# Altium PCB driver.PcbDoc
Units mil, origin at the board's own origin, x right, y up, seen from the top; angles counter-clockwise.
Board outline 3238.38 x 2096.64 mil, 2 copper layers (Top Layer, Bottom Layer); 67 components, 47 nets, 191 pads, 17 vias.
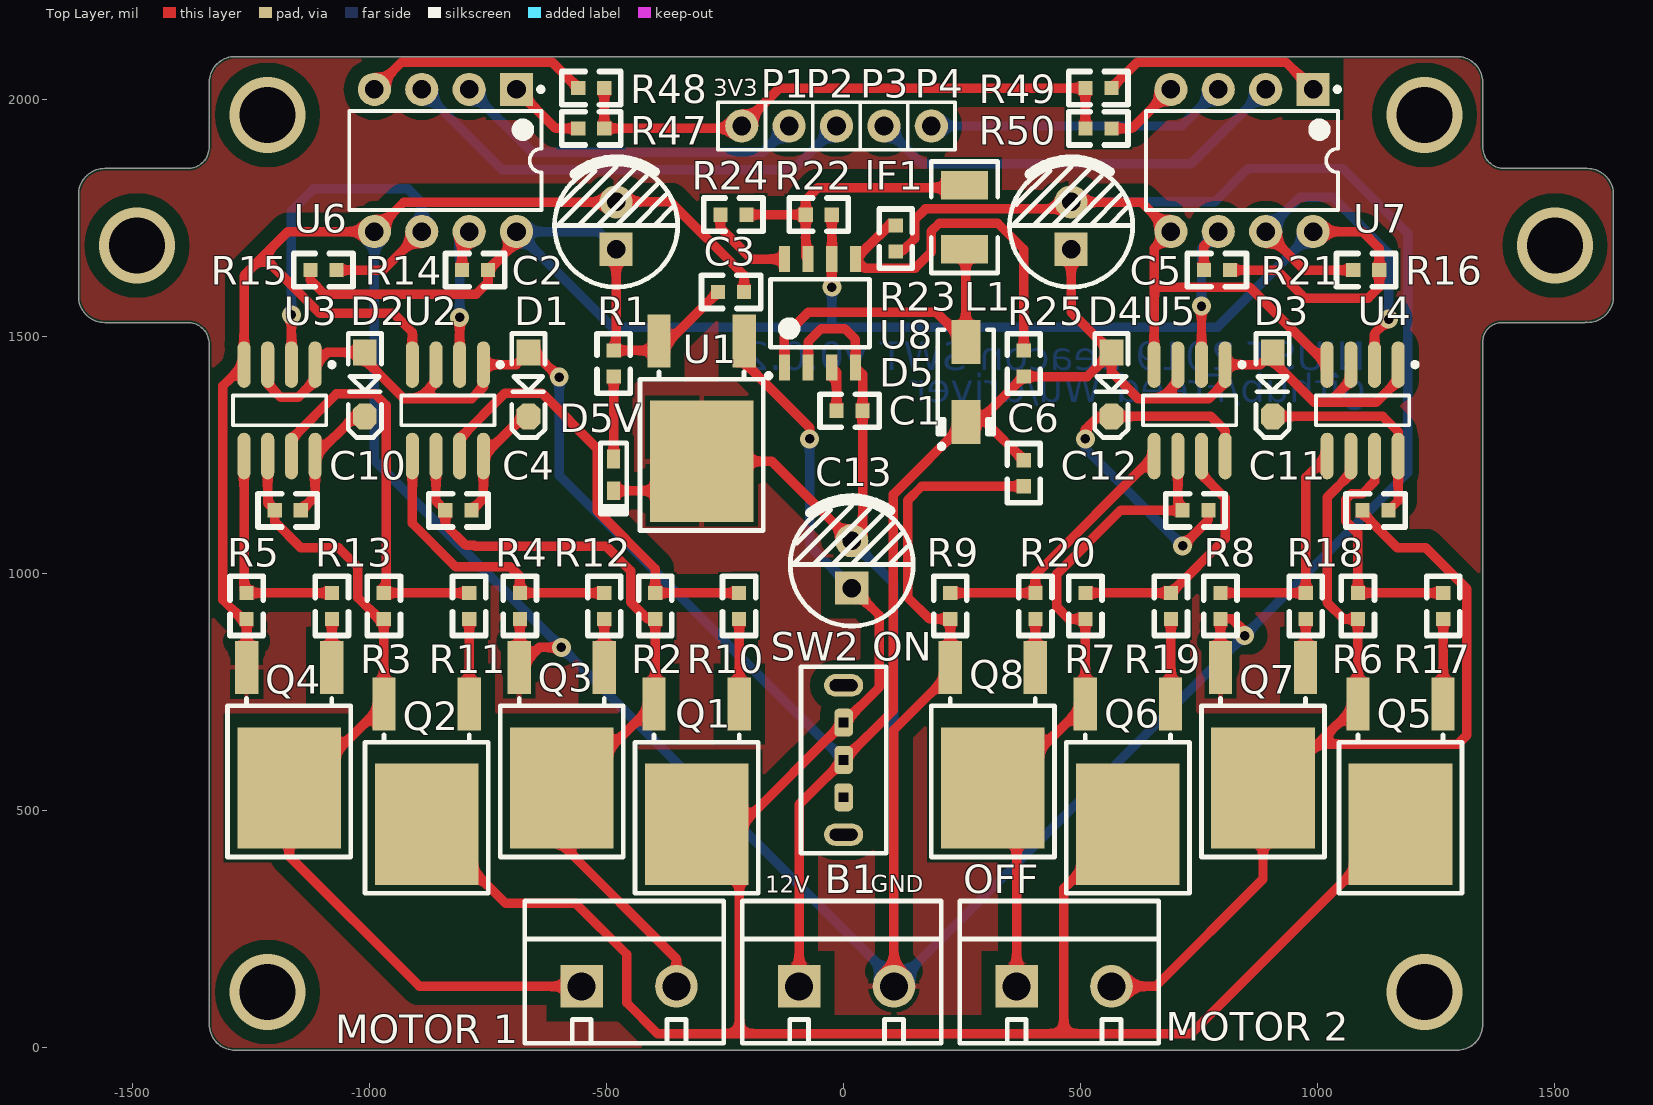
[diagram p0: Top Layer view]
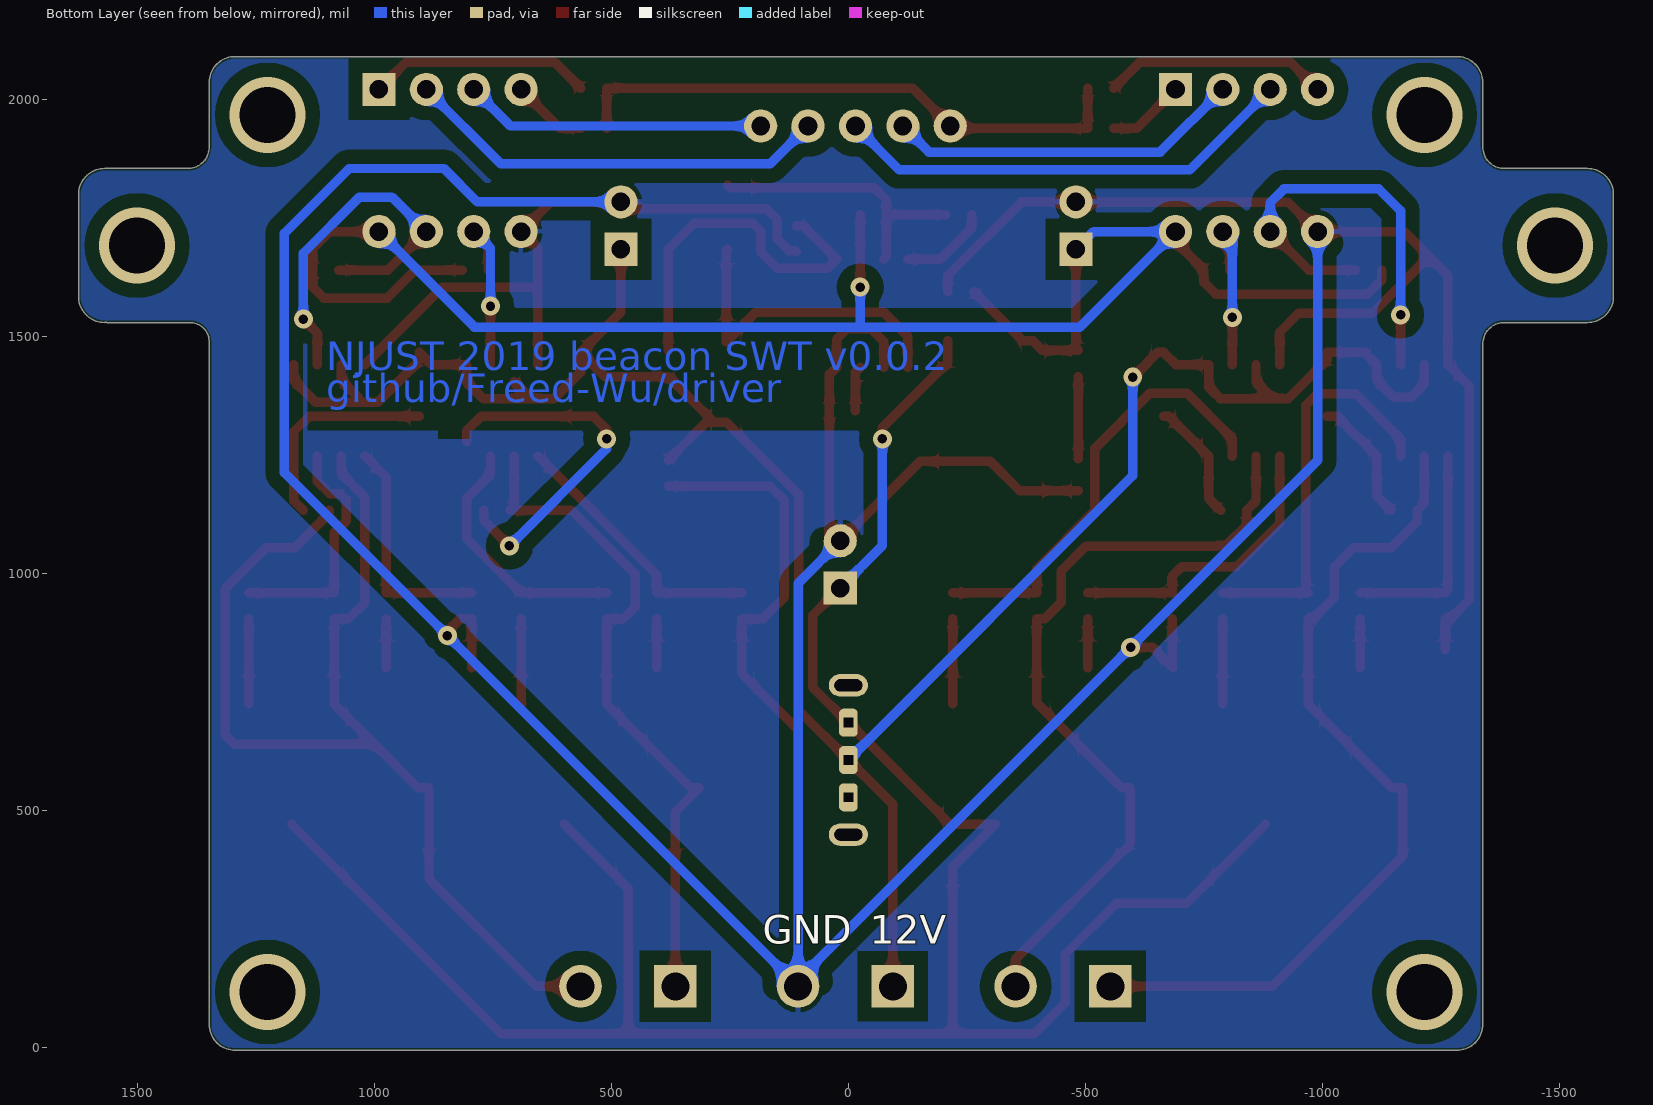
[diagram p1: Bottom Layer view, seen from below]

## Layer stack, top to bottom
Top Solder: solder mask 0.4, Solder Resist, Dk 3.5
Top Layer: signal copper 1.4
Dielectric1: dielectric 12.6, FR-4, Dk 4.8
Bottom Layer: signal copper 1.4
Bottom Solder: solder mask 0.4, Solder Resist, Dk 3.5

## Board outline
-1338.6,49.97 cw(c-1333.58,50) -1338.6,50 -1338.6,1485.43 ccw(c-1383.58,1485.43) -1383.58,1530.42 -1559.17,1530.42 cw(c-1559.17,1585.43) -1614.19,1585.43 -1614.19,1800.39 cw(c-1559.17,1800.39) -1559.17,1855.41 -1383.58,1855.41 ccw(c-1383.58,1900.39) -1338.6,1900.39 -1338.6,2036.61 cw(c-1283.58,2036.61) -1283.65,2091.63 cw(c-1283.58,2086.61) -1283.58,2091.63 1293.58,2091.63 cw(c1293.58,2036.61) 1348.6,2036.61 1348.6,1900.39 ccw(c1393.58,1900.39) 1393.58,1855.41 1569.17,1855.41 cw(c1569.17,1800.39) 1624.19,1800.39 1624.19,1585.43 cw(c1569.17,1585.43) 1569.17,1530.42 cw(c1569.17,1535.43) 1566.67,1531.08 cw(c1564.17,1535.43) 1564.17,1530.42 1389.02,1530.42 ccw(c1389.02,1490) 1348.6,1490 cw(c1343.58,1490) 1348.6,1489.97 1348.6,50.03 cw(c1343.58,50) 1348.6,50 cw(c1343.58,50) 1348.6,49.94 ccw(c1293.58,50) 1348.6,49.95 ccw(c1293.58,50) 1348.6,50 1348.6,50.03 1348.6,49.94 cw(c1293.58,50) 1293.58,-5.01 -1283.58,-5.02 cw(c-1283.58,0) -1283.63,-5.01 cw(c-1283.58,50)

## Design rules (kind name [scope] priority, off if disabled: settings)
Clearance Clearance_1 [InPolygon] p1: gap=30 ignorepadtopadclearanceinfootprint=FALSE
Clearance [All] p2: gap=10 ignorepadtopadclearanceinfootprint=FALSE except(0: Arc-Hole Track-Hole SMDPad-Hole THPad-Hole Via-Hole Fill-Hole Poly-Hole Region-Hole Text-Hole)
FabricationTestpoint [(IsPad And (OnTopLayer Or OnBottomLayer))] p1: side=3 testpointundercomponent=TRUE minsize=40 maxsize=100 preferedsize=60 minholesize=0 maxholesize=40 preferedholesize=32 testpointgrid=1 allowsidetop=TRUE allowsidebottom=TRUE usegrid=TRUE gridtolerance=0.01
PolygonConnect PolygonConnect_1 [IsVia] p1: connectstyle=Direct reliefconductorwidth=10 reliefentries=4 polygonreliefangle="90 Angle" airgapwidth=10
PolygonConnect [All] p2: connectstyle=Relief reliefconductorwidth=10 reliefentries=4 polygonreliefangle="90 Angle" airgapwidth=10
RoutingVias [All] p1: holewidth=20 width=40 viastyle="Through Hole" minholewidth=20 minwidth=40 maxholewidth=28 maxwidth=50
SolderMaskExpansion [All] p1: expansion=2.5
Width PWR [InNetClass('PWR')] p1: maxlimit=60 minlimit=15 preferedwidth=20
Width [All] p2: maxlimit=1000 minlimit=10 preferedwidth=20
29 further rules are at their usual default settings.

## Components (designator, comment, footprint, x,y, rotation, side; value= is the part's Value field where it differs from the comment)
B1 "BAT-IF" KF301-2P -93.88,130 r0 top
C1 "220p" 0603 -15,1344.4 r0 top
C2 "220u/25V" "CAP 2.5*6.3*7 - BK" -480,1735 r90 top
C3 "104" 0603 -265,1595 r0 top
C4 "105" 0603 -785.31,1134.21 r180 top
C5 "220u" "CAP 2.5*6.3*7 - BK" 480,1735 r90 top
C6 "0.1u" 0603 380,1240 r270 top
C10 "105" 0603 -1145.31,1134.21 r180 top
C11 "105" 0603 1149.69,1134.21 r180 top
C12 "105" 0603 769.69,1134.21 r180 top
C13 "220u" "CAP 2.5*6.3*7 - BK" 17.09,1020 r90 top
D1 "IN5819" SOD-123 -665,1400 r270 top
D2 "IN5819" SOD-123 -1010,1400 r270 top
D3 "IN5819" SOD-123 905,1400 r270 top
D4 "IN5819" SOD-123 565,1400 r270 top
D5 "IN5189" SMA 257.74,1405 r270 top
D5V "RED" LED-0603 -485.19,1209.07 r270 top
L1 "120uH" L1210 255,1685 r90 top
lF1 "CON5" 2.54排针1X5 -15,1945 r0 top
"MOTOR 1" "MOTOR IF" KF301-2P -552.76,130 r0 top
"MOTOR 2" "MOTOR IF" KF301-2P 365,130 r0 top
Q1 "7843" TO-252 -310.23,471.92 r180 top
Q2 "7843" TO-252 -879.76,471.92 r180 top
Q3 "7843" TO-252 -594.76,548.42 r180 top
Q4 "7843" TO-252 -1169.76,548.42 r180 top
Q5 "7843" TO-252 1174.77,471.92 r180 top
Q6 "7843" TO-252 599.77,471.92 r180 top
Q7 "7843" TO-252 884.77,548.42 r180 top
Q8 "7843" TO-252 314.77,548.42 r180 top
R1 "1K" 0603 -485.19,1471.5 r270 top
R2 "10K" 0603 -397.45,905 r90 top
R3 "10K" 0603 -970,905 r90 top
R4 "10K" 0603 -683,905 r90 top
R5 "10K" 0603 -1259.53,905 r90 top
R6 "10K" 0603 1085,905 r90 top
R7 "10K" 0603 510,905 r90 top
R8 "10K" 0603 795,905 r90 top
R9 "10K" 0603 225,905 r90 top
R10 "33R" 0603 -220.47,960 r270 top
R11 "33R" 0603 -790,960 r270 top
R12 "33R" 0603 -505,960 r270 top
R13 "33R" 0603 -1079.57,960 r270 top
R14 "390" 0603 -750,1640.98 r180 top
R15 "390" 0603 -1125,1640.98 r0 top
R16 "390" 0603 1075,1640.98 r0 top
R17 "33R" 0603 1265,960 r270 top
R18 "33R" 0603 975,960 r270 top
R19 "33R" 0603 690.43,960 r270 top
R20 "33R" 0603 404.53,960 r270 top
R21 "390" 0603 815,1640.98 r180 top
R22 "0R5" 0603 -25,1757.93 r180 top
R23 "3K8" 0603 110,1680 r90 top
R24 "220" 0603 -260,1757.93 r0 top
R25 "30K" 0603 380,1471.5 r270 top
R47 "390" 0603 -505,1940 r180 top
R48 "390" 0603 -505,2025 r180 top
R49 "390" 0603 510,2025 r0 top
R50 "390" 0603 510,1940 r0 top
SW2 "SW-SPDT" SW3-H2X3_8.6X4.5_L 0,646.89 r90 top
U1 "LM7805" TO-252 -299.76,1237.52 r180 top
U2 "IR2104" SO8_M -835,1345.18 r270 top
U3 "IR2104" SO8_M -1190,1345.18 r270 top
U4 "IR2104" SO8_M 1095,1345.18 r270 top
U5 "IR2104" SO8_M 730,1345.18 r270 top
U6 "HCPL2630" DIP-8 -840,1872.26 r270 top
U7 "HCPL2630" DIP-8 840.43,1872.26 r270 top
U8 "MC34063" SO-8 -50,1550 r90 top

## Footprints (in the part's own frame and the unit in brackets; to place one, negate y for a bottom-side part, rotate by r counter-clockwise, add the part's x,y. Pads: shape width x height; smd on the part's side, far side on the other; paste and mask are expansions set on the pad)
2.54排针1X5 [mil]
  round 70 hole 39.37: 1(-200,0) 2(-100,0) 3(0,0) 4(100,0) 5(200,0)
  silkscreen extent -250,-50 250,50, body extent -250,-50 250,50, height 98
0603 [mil]
  rect 30x30 smd: 1(0,0) 2(55,0)
  silkscreen extent -35,-35 90,35
"CAP 2.5*6.3*7 - BK" [mil]
  rect 70x70 hole 39.37: 1(-50,0)
  round 70 hole 39.37: 2(50,0)
  silkscreen extent -130,-130 140,130, body extent -124,-124 124,124, height 277
DIP-8 [mil]
  rect 70x70 hole 39.37: 1(-150,150)
  round 70 hole 39.37: 2(-150,50) 3(-150,-50) 4(-150,-150) 5(150,-150) 6(150,-50) 7(150,50) 8(150,150)
  silkscreen extent -155,-203 104,206, body extent -142,-203 142,203, height 200
KF301-2P [mil]
  rect 90x90 hole 59.06: 1(0,0)
  round 90 hole 59.06: 2(200,0)
  silkscreen extent -120,-120 300,180, body extent -113,-118 300,181, height 396
L1210 [mil]
  rect 60x100 smd: 1(0,0) 2(135,0)
  silkscreen extent -50,-70 185,70, body extent 7,-52 131,46, height 79
LED-0603 [mm]
  rect 1x0.7 smd: 1(-0.85,0) 2(0.85,0)
  silkscreen extent -1.7,-0.7 2.1,0.7, body extent -1.03,-0.46 1.03,0.45, height 0.85
SMA [mm]
  rect 2.35x1.55 smd: 1(-2.15,0) 2(2.15,0)
  silkscreen extent -2.8,-1.5 3.58,1.5, body extent -2.6,-1.3 2.6,1.3, height 2.64
SO8_M [mm]
  oval 2.5x0.7 smd: 1(-2.45,1.905) 2(-2.45,0.635) 3(-2.45,-0.635) 4(-2.45,-1.905) 5(2.45,-1.905) 6(2.45,-0.635) 7(2.45,0.635) 8(2.45,1.905)
  silkscreen extent -2.57,-2.5 0.8,2.93, body extent -2,-2.5 2,2.5, height 1.75
SO-8 [mm]
  rect 1.4x0.6 smd: 1(-2.9,1.905) 2(-2.9,0.635) 3(-2.9,-0.635) 4(-2.9,-1.905) 5(2.9,-1.905) 6(2.9,-0.635) 7(2.9,0.635) 8(2.9,1.905)
  silkscreen extent -3.48,-2.65 1.82,2.88, body extent -3.03,-2.57 3.03,2.57, height 1.95
SOD-123 [mil]
  rect 55x50 smd: 1(-67.5,0)
  oct 55x50 smd: 2(67.5,0)
  silkscreen extent -108,-35 112,35, body extent -73,-31 73,31, height 48
SW3-H2X3_8.6X4.5_L [mm]
  oval 1.2x2.1 hole 0.65 slot 1.5 at 90 deg: 0(-5,0) 0(3,0)
  rrect50% 1.5x1 hole 0.5 square: 1(-3,0) 2(-1,0) 3(1,0)
  silkscreen extent -6,-2.29 4,2.29, body extent -5.26,-2.23 3.23,2.21, height 8.91
TO-252 [mm]
  rect 1.25x2.85 smd: 1(-2.28,-6.45) 3(2.28,-6.45)
  rect 5.55x6.5 smd: 4(0,0)
  silkscreen extent -3.3,-4.8 3.3,3.7, body extent -3.27,-7.25 3.27,2.69, height 2.41

## Part data
C1 C3 C4 C6 C10 C11 C12: library part 普通电容, "Capacitor"
C2 C5 C13: library part 电解电容, "Capacitor"
D1 D2 D3 D4: library part DIODE
D5: library part "Diode 1N5400", "SS14", ComponentLink1Description="Manufacturer Link", ComponentLink1URL=http://www.fairchildsemi.com/, ComponentLink2Description=Datasheet, ComponentLink2URL=http://www.fairchildsemi.com/ds/1N%2F1N5400.pdf, DatasheetVersion=1998, LatestRevisionDate=17-Jul-2002, LatestRevisionNote="Re-released for DXP Platform.", PackageDescription="Diode, Axial; Body 9.5 x 5.6 mm (LxDia. max), Lead Dia. 1.32 mm (max)", PackageReference=DO-201AD, PackageVersion=Aug-1999, Published=8-Jun-2000, Publisher="Altium Limited"
D5V: library part LED, "LED"
L1: library part INDUCTANCE, "Inductance"
Q1 Q2 Q3 Q4 Q5 Q6 Q7 Q8: library part FDB52N20_2, "N-Channel MOSFET"
R1 R2 R3 R4 R5 R6 R7 R8 R9 R10 R11 R12 R13 R14 R15 R16 R17 R18 R19 R20 R21 R22 R23 R24 R25 R47 R48 R49 R50: library part RES
SW2: library part SWITCH-NKK-M201x, "Switch"
U1: library part 7805

## Via types
v1: diameter 40, hole 20, Top Layer to Bottom Layer, 11 vias
v2: diameter 160, hole 118.11, Top Layer to Bottom Layer, 6 vias

## Nets (pads, with @x,y where several pads share a name; then routed paths per layer and width w, separated by ;. In a path a pad name is that pad's centre, name@x,y a point inside that pad or via, vN(x,y) a via of type N, cw(c..) or ccw(c..) an arc to the next point about the centre after c; other vN are vias at no path point)
3V3: lF1.1 R47.1 R48.1 R49.1 R50.1 | length 1220.2
  Top Layer w20: R48.1 R47.1 -220,1940 lF1.1 -135,2025 R49.1 R50.1
+5: C2.1 C3.1 R1.1 R14.1 R15.1 R16.2 R21.1 R22.1 U1.3 U6.8 U7.8 U8.6 | length 3934.1
  Top Layer w20: R15.1 -1125,1620 -1095,1590 -775.31,1590 -750,1615.31 R14.1 -690,1700.98 U6.8 ; C2.1@-480,1685.79 C2.1 -480,1476.69 R1.1 -409.48,1471.5 U1.3 -368.54,1491.46 C3.1 ; v1(-25,1605) U8.6 R22.1 ; R21.1 913.91,1640.98 973.26,1581.63 1106.63,1581.63 1130,1605 R16.2 1130,1686.83 1094.57,1722.26 U7.8
  Bottom Layer w20: C2.1 -517.26,1722.26 U6.8 -488.52,1520.79 -24.23,1520.79 ; v1(-25,1605) -25,1521.56 -24.23,1520.79 ; U7.8 788.96,1520.79 -24.23,1520.79
+12: B1.1 C5.1 C6.1 D1.1 D2.1 D3.1 D4.1 D5.2 R25.2 SW2.2 U2.1 U2.3 U3.1 U3.3 U4.1 U4.3 U5.1 U5.3 | length 5066.9
  Top Layer w20: U3.3 -1215,1400 -1187.42,1372.42 -1151.01,1372.42 -1115,1408.43 U3.1 -1089.13,1467.5 D2.1 -1010,1451.95 -928.05,1370 -895,1370 ; U2.3 -860,1405 -895,1370 ; v1(-600,1415) -652.5,1467.5 D1.1 -690.86,1441.63 U2.1 -760,1394.54 -784.54,1370 -895,1370 ; B1.1 -93.88,513.64 SW2.2 105,712.52 105,1167.61 D5.2 D5.2@283.86,1320.35 ; C6.1 299.65,1320.35 D5.2@283.86,1320.35 ; C5.1@480,1685.79 C5.1 480,1552.5 D4.1 ; U5.3@705,1405 670,1370 ; 1033.99,1372.42 1070,1408.43 U4.3 ; U4.1 1170,1408.43 1124.07,1362.5 992.5,1362.5 905,1450 D3.1 879.14,1441.63 U5.1 805,1404.42 770.58,1370 670,1370 ; D5.2@283.86,1320.35 R25.2 514,1416.5 D4.1 ; D4.1 565,1425.95 620.96,1370 670,1370
  Bottom Layer w20: v1(-600,1415) -600,1207.52 SW2.2
BAT: C13.1 Q1.4 Q2.4 Q5.4 Q6.4 SW2.3 U1.1 | length 4811.6
  Top Layer w20: Q2.4 -712.84,305 -565,305 -457.63,197.63 -457.63,95.18 -392.45,30 -220,30 ; U1.1 -210,1446.93 -71.97,1308.9 v1(-71.97,1285) ; C13.1@17.09,970.79 75,912.87 75,760.59 0.67,686.26 SW2.3 -214.33,471.92 Q1.4 -220,381.69 -220,30 ; Q6.4 464.44,336.6 464.44,30 ; Q5.4 732.84,30 464.44,30 ; -220,30 464.44,30
  Bottom Layer w20: v1(-71.97,1285) -71.97,1059.84 C13.1@17.09,970.79
GND: B1.2 C1.2 C2.2 C3.2 C5.2 C6.2 C13.2 D5V.2 Q3.3 Q4.3 Q7.3 Q8.3 R4.1 R5.1 R8.1 R9.1 R23.1 U1.4 U2.4 U3.4 U4.4 U5.4 U6.5 U7.5 U8.2 U8.4 | length 12751.2
  Top Layer w20: Q4.3@-1259.53,840 R5.1 -1269.52,905 -1309.98,945.46 -1309.98,1396.65 U3.4 -1265,1629.53 -1225,1669.53 ; U2.4 -910,1510 -950,1550 -1105.47,1550 -1225,1669.53 ; Q3.3 Q3.3@-683,803.88 ; R4.1 Q3.3@-683,803.88 ; v1(-595.5,845) -641.88,845 Q3.3@-683,803.88 ; D5V.2 -361.68,1175.61 U1.4 -151.22,1237.52 17.09,1069.21 40,1092.13 C1.2 40,1420.83 U8.4 25,1495 2.28,1517.72 -47.28,1517.72 -75,1490 U8.2 ; C2.2@-480,1784.21 -928.05,1784.21 U6.5 -1172.26,1722.26 -1225,1669.53 ; C2.2 -365,1785 -210,1630 C3.2 ; B1.2 106.12,671.21 225,790.09 Q8.3 ; R23.1@110.46,1680 R23.1 112.26,1682.26 124.99,1682.26 150,1707.26 150,1747.5 172.5,1770 465.79,1770 480,1784.21 628.49,1784.21 U7.5 655,1686.83 655,1598.42 ; Q8.3 R9.1 180.86,905 135,950.86 135,1155.18 164.82,1185 C6.2 ; U5.4 655,1598.42 ; Q7.3 R8.1 819.69,905 854.69,870 v1(846.12,870) ; U4.4 856.63,1605 661.59,1605 655,1598.42
  Bottom Layer w20: U6.5 -990,1239.5 v1(-595.5,845) B1.2@106.12,143.38 ; C13.2@17.09,1069.21 106.12,980.18 B1.2@106.12,143.38 ; C5.2 783.09,1785 853.44,1855.34 1053.12,1855.34 1190,1718.47 1190,1213.88 v1(846.12,870) B1.2 B1.2@106.12,143.38
NetC1_1: C1.1 U8.3 | length 95.6
  Top Layer w20: U8.3 -15,1425.83 C1.1
NetC4_1: C4.1 D1.2 U2.8 | length 254.7
  Top Layer w20: C4.1 -760,1159.53 U2.8 -676.22,1332.5 D1.2
NetC4_2: "MOTOR 1.2" C4.2 Q1.3 Q3.4 R2.1 U2.6 | length 1684.2
  Top Layer w20: U2.6 -860,1153.9 C4.2 -840.31,1103.9 -796.62,1060.21 -779.79,1060.21 -778.38,1058.8 -501.54,1058.8 -449.54,1006.79 -449.54,940.45 -414.09,905 R2.1 -397.45,728.41 Q1.3 -577.44,548.42 Q3.4 -594.76,429.76 -352.76,187.76 -352.76,130
NetC10_1: C10.1 D2.2 U3.8 | length 266.8
  Top Layer w20: C10.1 -1115,1164.53 U3.8 -1031.22,1332.5 D2.2
NetC10_2: "MOTOR 1.1" C10.2 Q2.3 Q4.4 R3.1 U3.6 | length 1825.5
  Top Layer w20: U3.6 -1215,1148.9 C10.2 -1200.31,1110.31 -1145,1055 -1065,1055 -1025,1015 -1025,950 -980,905 R3.1 -970,726.33 Q2.3 -1146.97,548.42 Q4.4 -1169.76,404.76 -895,130 -552.76,130
NetC11_1: C11.1 D3.2 U4.8 | length 452.6
  Top Layer w20: D3.2 1137.35,1332.5 1170,1299.84 U4.8 1170,1154.53 C11.1
NetC11_2: "MOTOR 2.2" C11.2 Q5.3 Q7.4 R6.1 U4.6 | length 2391.1
  Top Layer w20: 565,130 658.56,130 884.77,356.2 Q7.4 907.56,548.42 1000,640.86 ; U4.6 1070,1211.32 1020,1161.31 1020,940 1055,905 R6.1 Q5.3 1000,640.86 ; C11.2 1094.69,1128.48 1168.17,1055 1228.28,1055 1315,968.28 1315,660 1295.86,640.86 1000,640.86
NetC12_1: C12.1 D4.2 U5.8 | length 771.2
  Top Layer w20: v1(510,1285) 510,1305 537.5,1332.5 D4.2 775,1332.5 805,1302.5 U5.8@805,1279.09 ; v1@715,1059.84 v1(715,1059.21) 769.69,1113.9 C12.1
  Bottom Layer w20: v1(510,1285) 510,1264.21 v1(715,1059.21)
NetC12_2: "MOTOR 2.1" C12.2 Q6.3 Q8.4 R7.1 U5.6 | length 1466.3
  Top Layer w20: 365,130 365,498.18 Q8.4 332.56,548.42 Q6.3 R7.1 475,905 450,930 450,1000 584.21,1134.21 C12.2 705,1143.9 U5.6
NetD5_1: D5.1 L1.1 U8.1 | length 692.1
  Top Layer w20: U8.1 -125,1501.64 -74.14,1552.5 194.89,1552.5 D5.1 257.74,1682.26 L1.1
NetD5V_1: D5V.1 R1.2 | length 174
  Top Layer w20: D5V.1 R1.2
NetL1_2: L1.2 R22.2 R24.2 U8.7 | length 599.9
  Top Layer w20: R24.2 R22.2 ; U8.7 -80,1669.17 R22.2 ; L1.2 250,1815 -54.29,1815 -80,1789.29 R22.2
NetQ1_1: Q1.1 R10.2 | length 179.1
  Top Layer w20: Q1.1 R10.2
NetQ2_1: Q2.1 R11.2 | length 179.1
  Top Layer w20: Q2.1 R11.2
NetQ3_1: Q3.1 R12.2 | length 102.6
  Top Layer w20: Q3.1 R12.2
NetQ4_1: Q4.1 R13.2 | length 102.8
  Top Layer w20: Q4.1 -1079.57,802.79 R13.2
NetQ5_1: Q5.1 R17.2 | length 179.3
  Top Layer w20: Q5.1 1265,726.33 R17.2
NetQ6_1: Q6.1 R19.2 | length 179.5
  Top Layer w20: Q6.1 690.43,726.76 R19.2
NetQ7_1: Q7.1 R18.2 | length 102.8
  Top Layer w20: Q7.1 975,802.83 R18.2
NetQ8_1: Q8.1 R20.2 | length 102.6
  Top Layer w20: Q8.1 R20.2
NetR2_2: R2.2 R10.1 U2.7 | length 947.8
  Top Layer w20: U2.7 -810,1286 -714.5,1381.5 -636.5,1381.5 -520,1265 -520,1133.64 -397.45,1011.09 R2.2 R10.1
NetR3_2: R3.2 R11.1 U3.7 | length 865.7
  Top Layer w20: U3.7 -1165,1285 -1070,1380 -989.21,1380 -965,1355.78 R3.2@-965,960 ; R3.2@-967,963 R3.2 R3.2@-965,960 ; R11.1 R3.2@-965,960
NetR4_2: R4.2 R12.1 U2.5 | length 628.2
  Top Layer w20: U2.5 -910,1106.84 -818.16,1015 -703,1015 -683,995 R4.2 R12.1
NetR5_2: R5.2 R13.1 U3.5 | length 470.9
  Top Layer w20: U3.5 -1265,965.47 R5.2 R13.1
NetR6_2: R6.2 R17.1 U4.7 | length 519.2
  Top Layer w20: U4.7 1120,1195 1094.21,1169.21 1071.4,1169.21 1059.69,1157.5 1059.69,1110.93 1082.17,1088.44 1085,1088.44 R6.2 R17.1
NetR7_2: R7.2 R19.1 U5.7 | length 537.1
  Top Layer w20: R7.2 R19.1 804.69,1074.25 804.69,1160.31 755,1210 U5.7
NetR8_2: R8.2 R18.1 U4.5 | length 487.4
  Top Layer w20: R8.2 R18.1 975,1203.72 U4.5
NetR9_2: R9.2 R20.1 U5.5 | length 572
  Top Layer w20: R9.2 R20.1 404.53,998.25 U5.5
NetR23_2: R23.2 R25.1 U8.5 | length 778.8
  Top Layer w20: R23.2 95.83,1735 U8.5 44.18,1645 150.86,1645 185,1679.14 185,1723.28 201.72,1740 325,1740 380,1685 R25.1
NetR24_1: R24.1 U8.8 | length 190.2
  Top Layer w20: R24.1 -260,1730 -194.17,1664.17 U8.8
NetR47_2: R47.2 U6.1 | length 164.1
  Top Layer w20: U6.1 -607.73,1940 R47.2
NetR48_2: R48.2 U6.4 | length 476.7
  Top Layer w20: U6.4 -932.26,2080 -615,2080 R48.2
NetR49_2: R49.2 U7.1 | length 472.1
  Top Layer w20: R49.2 620,2080 932.7,2080 U7.1
NetR50_2: R50.2 U7.4 | length 159.5
  Top Layer w20: R50.2 608.17,1940 U7.4
P1: R14.2 U2.2 U6.7 | length 376.4
  Top Layer w20: U2.2 v1(-810,1541.12) ; R14.2 -805,1707.26 U6.7
  Bottom Layer w20: v1(-810,1541.12) -810,1702.26 U6.7
P2: R15.2 U3.2 U6.6 | length 905.3
  Top Layer w20: U3.2 v1(-1165,1546.59) ; R15.2 -971.28,1640.98 U6.6
  Bottom Layer w20: v1(-1165,1546.59) -1165,1766.23 -1119.07,1812.15 -918.88,1812.15 -890,1783.28 U6.6
P3: R16.1 U4.2 U7.7 | length 804.3
  Top Layer w20: U7.7 971.71,1640.98 R16.1 ; U4.2 1120,1507.67 v1(1150,1537.66)
  Bottom Layer w20: U7.7 963.17,1795 1031.41,1795 1150,1676.41 v1(1150,1537.66)
P4: R21.2 U5.2 U7.6 | length 396
  Top Layer w20: U5.2 v1(755,1565) ; R21.2 760,1691.83 U7.6 ; v1(755,1565) 755,1568.41 v1(755,1565)
  Bottom Layer w20: v1(755,1565) 755,1686.82 U7.6
PWM1: lF1.2 U6.2 | length 752.6
  Bottom Layer w20: U6.2 -657.73,1890 -170,1890 lF1.2
PWM2: lF1.3 U6.3 | length 983.6
  Bottom Layer w20: U6.3 -720.24,1852.5 -107.5,1852.5 lF1.3
PWM3: lF1.4 U7.2 | length 903.7
  Bottom Layer w20: lF1.4 165,1865 733.17,1865 U7.2
PWM4: lF1.5 U7.3 | length 637.4
  Bottom Layer w20: lF1.5 713.17,1945 U7.3
pads on no net: SW2.0 SW2.1
copper on no net:
  other v2: -1215.47,118.11 1225.47,118.11 -1491.06,1692.91 1501.06,1692.91 -1215.47,1968.5 1225.47,1968.5

## Polygon pours and split planes (outlines as drawn)
GND on Top Layer "Top Layer-GND" (solid, remove dead copper, pour order 32): -1283.58,2086.61 1293.58,2086.61 cw(c1293.58,2036.61) 1343.58,2036.61 1343.58,1900.39 ccw(c1393.58,1900.39) 1393.58,1850.39 1569.17,1850.39 cw(c1569.17,1800.39) 1619.17,1800.39 1619.17,1585.43 cw(c1569.17,1585.43) 1569.17,1535.43 1389.02,1535.43 ccw(c1389.02,1490) 1343.58,1490 1343.58,50 cw(c1293.58,50) 1293.58,0 -1283.58,0 cw(c-1283.58,50) -1333.58,50 -1333.58,1485.43 ccw(c-1383.58,1485.43) -1383.58,1535.43 -1559.17,1535.43 cw(c-1559.17,1585.43) -1609.17,1585.43 -1609.17,1800.39 cw(c-1559.17,1800.39) -1559.17,1850.39 -1383.58,1850.39 ccw(c-1383.58,1900.39) -1333.58,1900.39 -1333.58,2036.61 cw(c-1283.58,2036.61) -1283.58,2086.61
no net on Top Layer "Top Layer-No Net" (solid, remove dead copper, pour order 16): 975,2076.61
no net on Top Layer "Top Layer-No Net 1" (solid, remove dead copper, pour order 12): 595,2076.61
no net on Top Layer "Top Layer-No Net 2" (solid, remove dead copper, pour order 6): -1338.58,1555
no net on Top Layer "Top Layer-No Net 3" (solid, remove dead copper, pour order 4): -240,2076.61
no net on Top Layer "Top Layer-No Net 4" (solid, remove dead copper, pour order 2): -1338.58,1557.3
GND on Bottom Layer "Bottom Layer-GND" (solid, remove dead copper, pour order 30): -1283.58,2086.61 1293.58,2086.61 cw(c1293.58,2036.61) 1343.58,2036.61 1343.58,1900.39 ccw(c1393.58,1900.39) 1393.58,1850.39 1569.17,1850.39 cw(c1569.17,1800.39) 1619.17,1800.39 1619.17,1585.43 cw(c1569.17,1585.43) 1569.17,1535.43 1389.02,1535.43 ccw(c1389.02,1490) 1343.58,1490 1343.58,50 cw(c1293.58,50) 1293.58,0 -1283.58,0 cw(c-1283.58,50) -1333.58,50 -1333.58,1485.43 ccw(c-1383.58,1485.43) -1383.58,1535.43 -1559.17,1535.43 cw(c-1559.17,1585.43) -1609.17,1585.43 -1609.17,1800.39 cw(c-1559.17,1800.39) -1559.17,1850.39 -1383.58,1850.39 ccw(c-1383.58,1900.39) -1333.58,1900.39 -1333.58,2036.61 cw(c-1283.58,2036.61)
no net on Bottom Layer "Bottom Layer-No Net" (solid, remove dead copper, pour order 28): 1293.58,2086.61

## Other copper
Bottom Layer:
  pour cut-out: -495,1245
  pour cut-out: -520,1252.96
  pour cut-out: -566.22,1540 1120,1540 1120,1338.35 -563.07,1338.35
  pour cut-out: -430,1507.5
  pour cut-out: -275,1489.64
  text "NJUST 2019 beacon SWT v0.0.2" at 1101.79,1429.59 h60
  text "github/Freed-Wu/driver" at 1101.79,1362.09 h60

## Silkscreen, mask and mechanical layers (free items; w line width, h text height)
Top Overlay:
  text "P1" at -175,2005 h60
  text "P2" at -80,2005 h60
  text "P3" at 35,2005 h60
  text "P4" at 150,2005 h60
  text "3V3" at -275,1995.66 h60
  text "ON" at 60,817.36 h60
  text "OFF" at 252.01,326.25 h60
  text "GND" at 57.09,316.92 h60
  text "12V" at -165,316.25 h60
Bottom Overlay:
  text "12V" at -45.34,220 h60
  text "GND" at 180.28,220 h60
Mechanical 1:
  lines w10: 1384.02,1535.43 1564.17,1535.43 ; 1389.02,1535.43 ccw(c1389.02,1490) 1343.58,1490 1343.58,50 ; 1569.17,1535.43 ccw(c1569.17,1585.43) 1619.17,1585.43 1619.17,1800.39 ccw(c1569.17,1800.39) 1569.17,1850.39 1393.58,1850.39 cw(c1393.58,1900.39) 1343.58,1900.39 1343.58,2036.61 ccw(c1293.58,2036.61) 1293.58,2086.61 -1283.58,2086.61 ccw(c-1283.58,2036.61) -1333.58,2036.61 -1333.58,1900.39 cw(c-1383.58,1900.39) -1383.58,1850.39 -1559.17,1850.39 ccw(c-1559.17,1800.39) -1609.17,1800.39 -1609.17,1585.43 ccw(c-1559.17,1585.43) -1559.17,1535.43 -1383.58,1535.43 cw(c-1383.58,1485.43) -1333.58,1485.43 -1333.58,50 ccw(c-1283.58,50) -1283.58,0 1293.58,0 ccw(c1293.58,50) 1343.58,50 ; 1343.58,50 ccw(c1343.58,50) 1343.58,50 ; 1343.58,1936.13 ccw(c1343.58,1936.13) 1343.58,1936.13